# EAGLE board Transmittercircuit V4 (EAGLE 9.6.2)
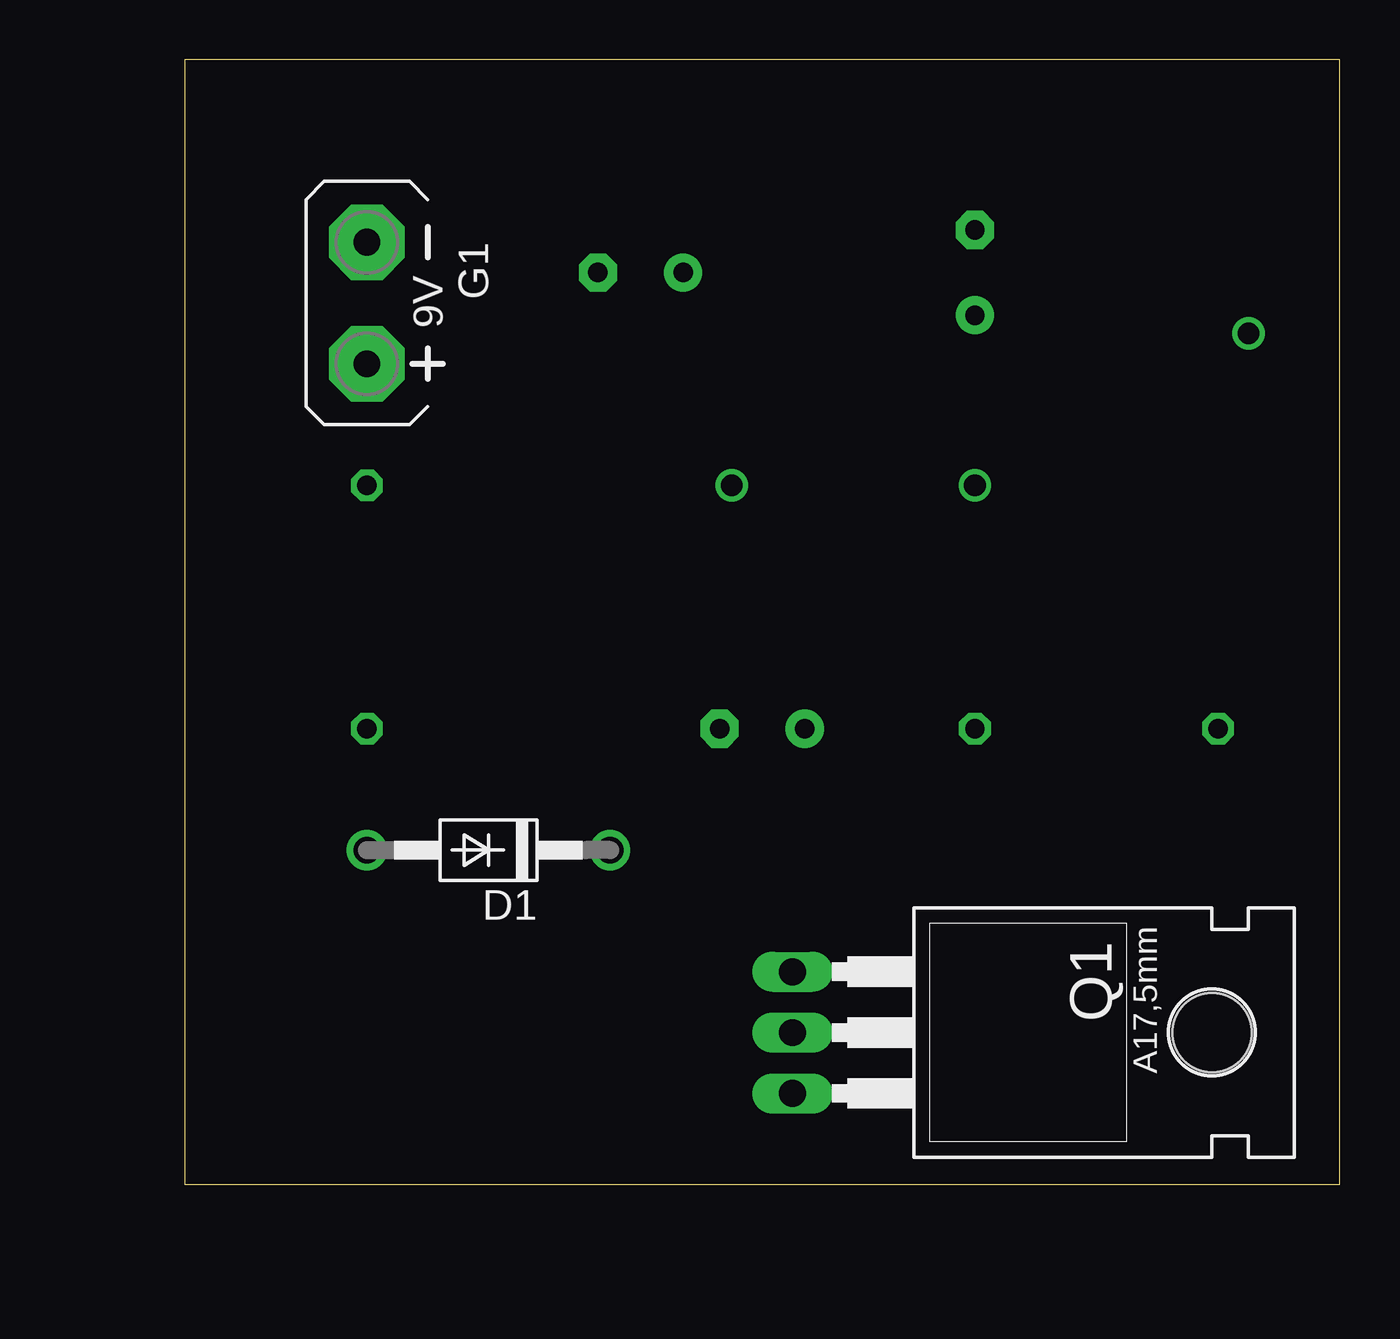
[diagram p0: board, top side]
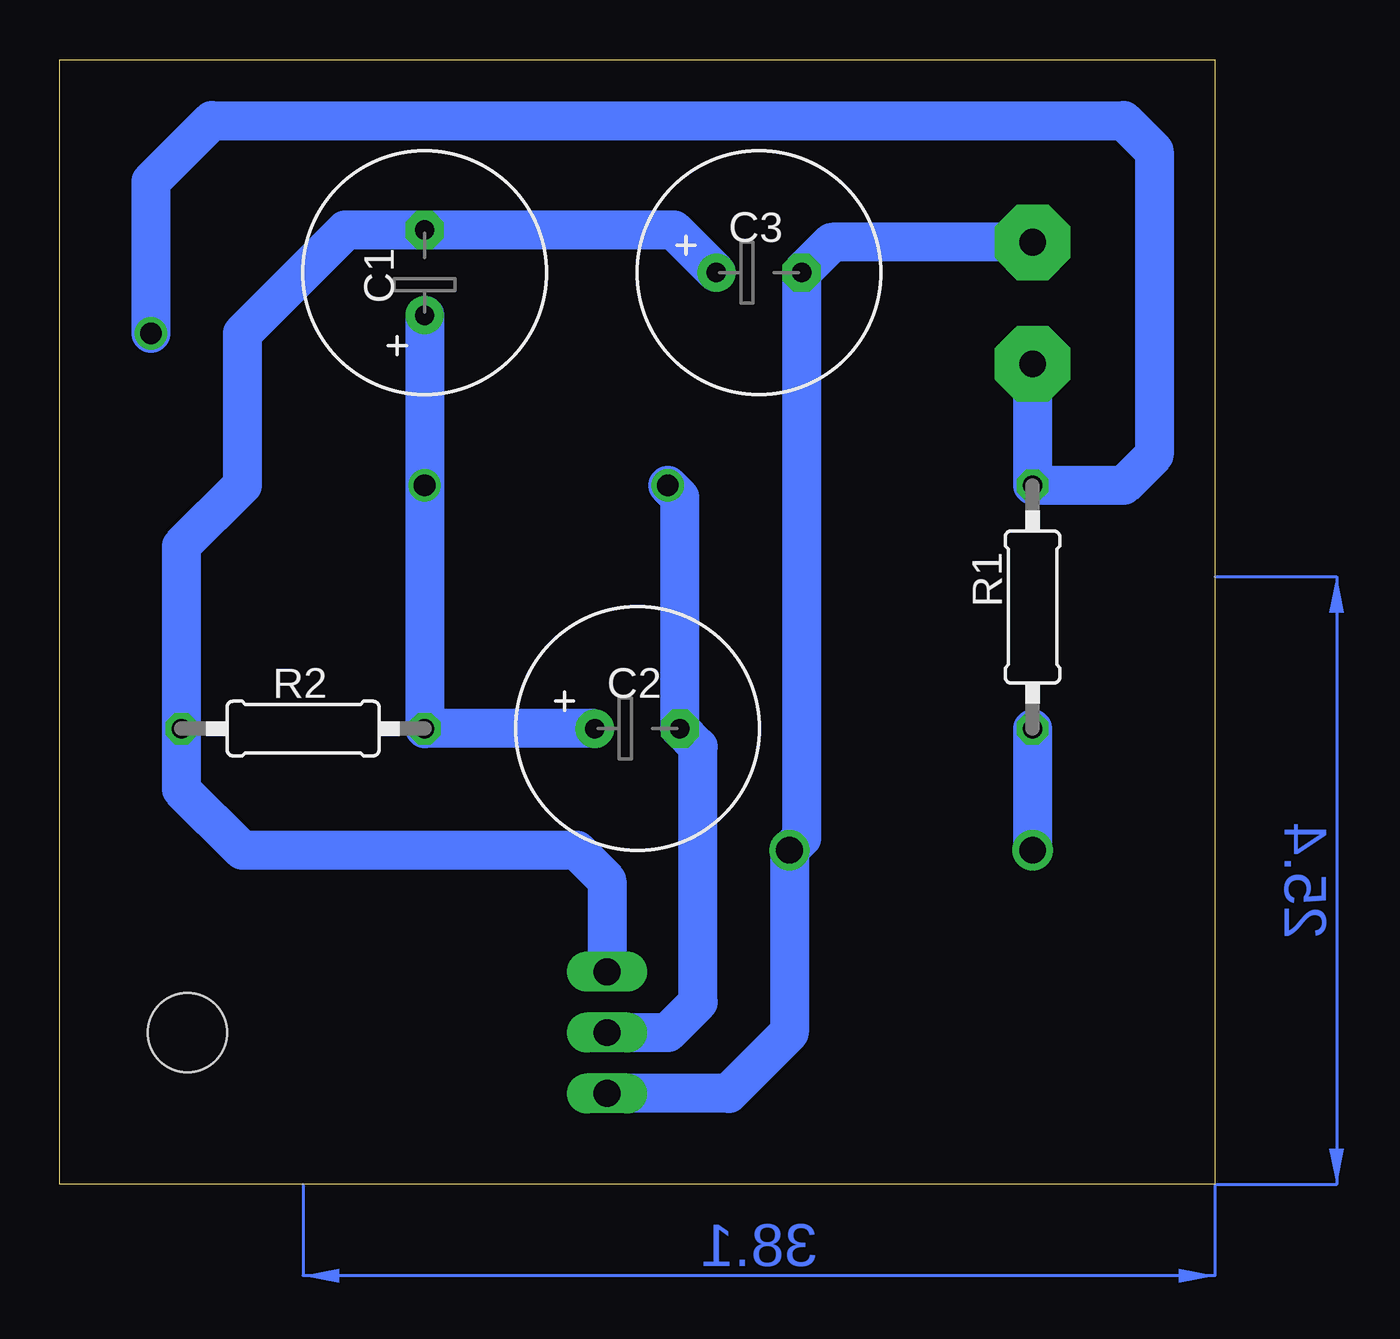
[diagram p1: board, bottom side, seen from below]

Size 48.26 x 46.99 mm. Coordinates in mm from the lower left corner, seen from the top.
Outline: 0,0 48.26,0 48.26,46.99 0,46.99 0,0
Copper layers (1*16): Top 0.035mm / dielectric 1.5mm / Bottom 0.035mm
Design rules "default": minimum track width 6mil, minimum drill 0.35mm, track to track 6mil, track to pad 6mil, pad to pad 6mil, via to via 6mil, smd to smd 6mil, copper to edge 40mil, drill to drill 6mil, minimum pad ring 10mil, minimum via ring 8mil, stop-mask expansion 4mil, vias tented up to drill 0mil, thermal gap 10mil

## Footprints (pad centres in the part's own frame; a part is rotated, then mirrored left to right if it is on the bottom)
E3,5-10 = drill 0.813 pad 1.6: + -1.778,0 | drill 0.813 pad 1.6 octagon: - 1.778,0
DO41-10 = drill 1.118: A 5.08,0; C -5.08,0
AB9V = drill 1.118 pad 3.15 octagon: + 0,2.54; - 0,-2.54
TO220BH = drill 1.118 long: D 0,-6.35; G -2.54,-6.35; S 2.54,-6.35 | hole 3.302: 0,11.176
0207/10 = drill 0.813 octagon: 1 -5.08,0; 2 5.08,0

## Placement (x,y rotation side)
C1  [E3,5-10]  33.02,38.1 90 bottom
C2  [E3,5-10]  24.13,19.05 0 bottom
C3  [E3,5-10]  19.05,38.1 0 bottom
D1  1N4004  [DO41-10]  12.7,13.97 180 top
G1  AB9V  [AB9V]  7.62,36.83 180 top
Q1  IRFZ48Z  [TO220BH]  31.75,6.35 270 top
R1  [0207/10]  7.62,24.13 90 bottom
R2  [0207/10]  38.1,19.05 0 bottom

## Library data of the parts
C1-C3 = rcl; SPICEPREFIX: C
D1 = diode
G1 = battery
Q1 = transistor-power
R1 R2 = rcl; SPICEPREFIX: R

## Nets
0: C3.- D1.C G1.- Q1.S
N$1: C1.+ C2.+ R2.2
N$2: C1.- C3.+ Q1.G R2.1
N$3: D1.A R1.1
N$4: C2.- Q1.D
N$6: G1.+ R1.2

## Tracks (layer width: path | path; a pad name or v marks a point on that pad's centre or on a via)
0
  Bottom 1.626: Q1.S 20.32,3.81 17.78,6.35 D1.C 17.27,14.48 C3.- 16,39.37 G1.-
N$1  (via drill 0.9)
  Bottom 1.626: C2.+ R2.2 v33.02,29.21 C1.+
N$2
  Bottom 1.626: Q1.G 25.4,12.7 26.67,13.97 40.64,13.97 43.18,16.51 R2.1 43.18,26.67 40.64,29.21 40.64,35.56 36.32,39.88 C1.- 22.61,39.88 C3.+
N$3
  Bottom 1.626: R1.1 D1.A
N$4  (via drill 0.9)
  Bottom 1.626: Q1.D 22.86,6.35 21.59,7.62 21.59,18.29 C2.- 22.35,28.7 v22.86,29.21
N$6  (via drill 0.9)
  Bottom 1.626: G1.+ R1.2 3.81,29.21 2.54,30.48 2.54,43.18 3.81,44.45 41.91,44.45 44.45,41.91 v44.45,35.56
(copper drawn outside any net)
  shapes: Bottom area x2